# Altium PCB soldering_station_controls.PcbDoc
Units mil, origin at the board's own origin, x right, y up, seen from the top; angles counter-clockwise.
Board outline 2900 x 925 mil, 2 copper layers (Top Layer, Bottom Layer); 17 components, 11 nets, 51 pads, 1 vias.
Unrouted connection lines stored in the file: 22.
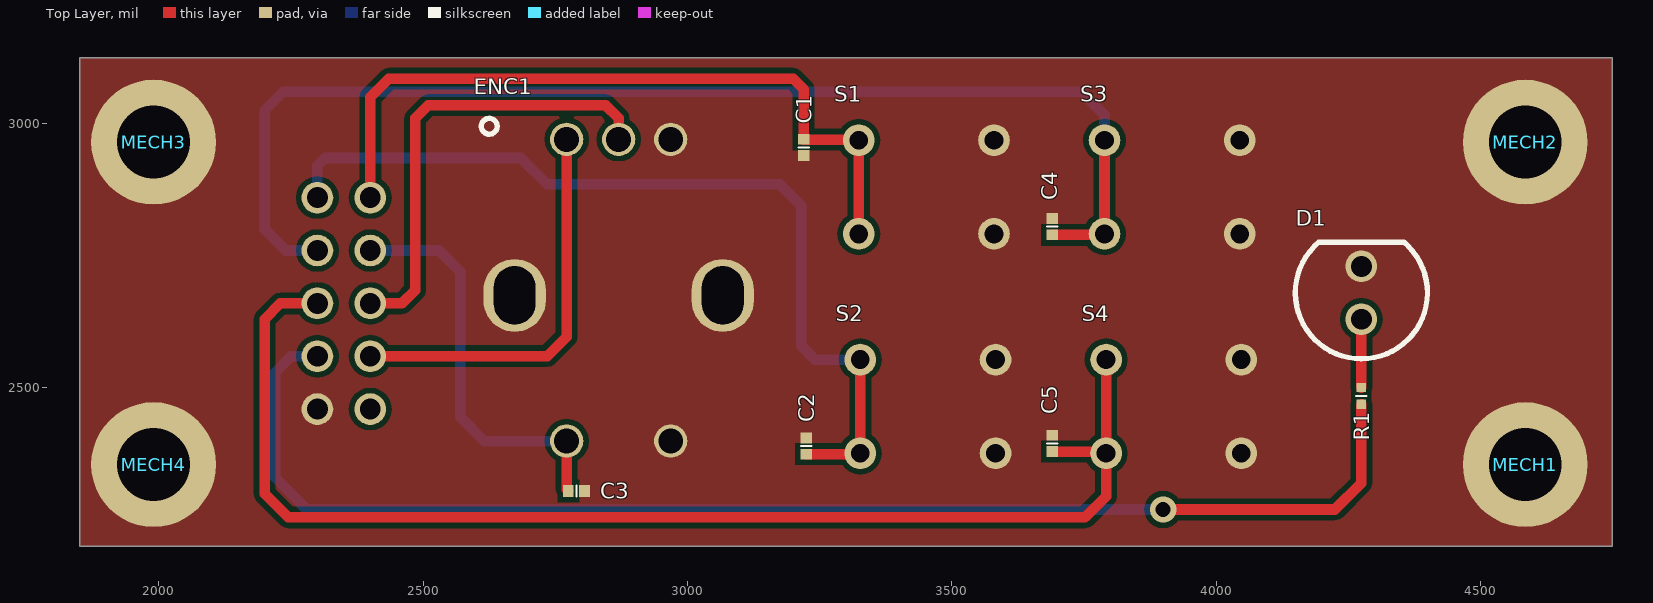
[diagram p0: Top Layer view]
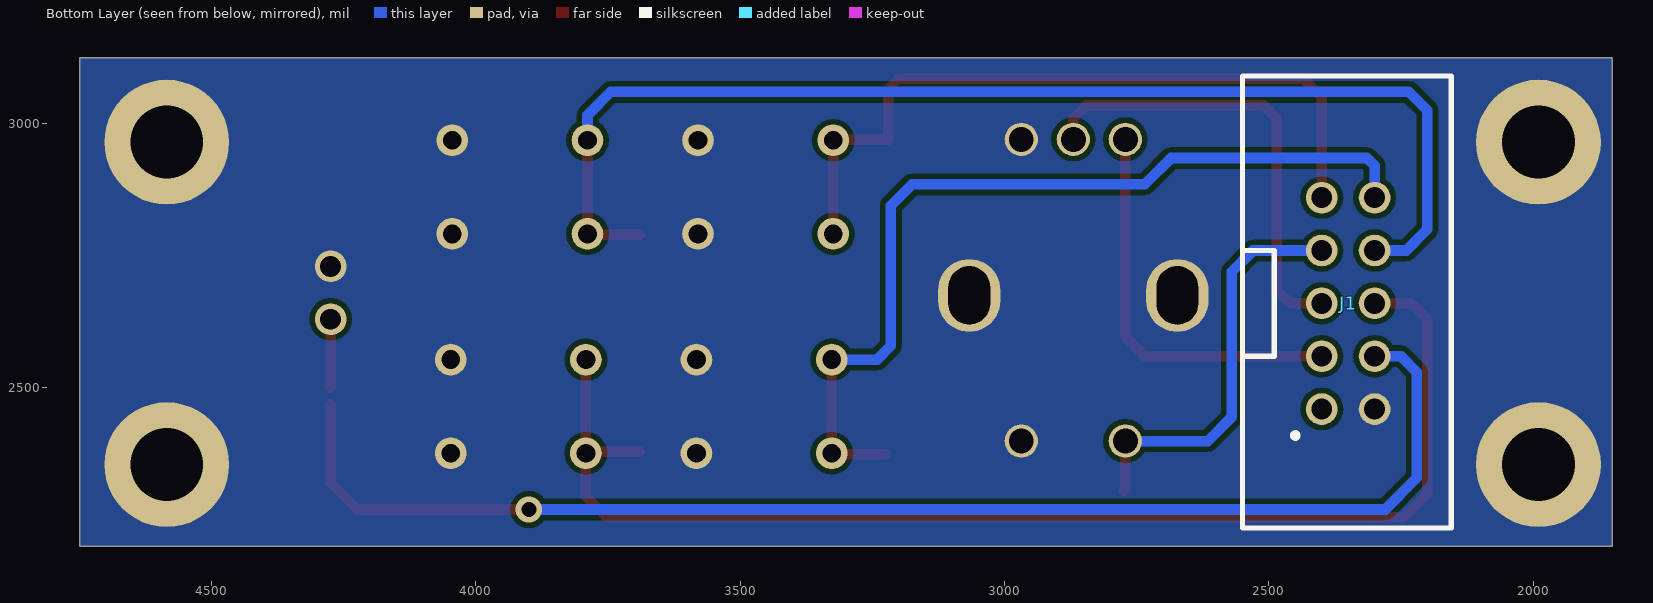
[diagram p1: Bottom Layer view, seen from below]
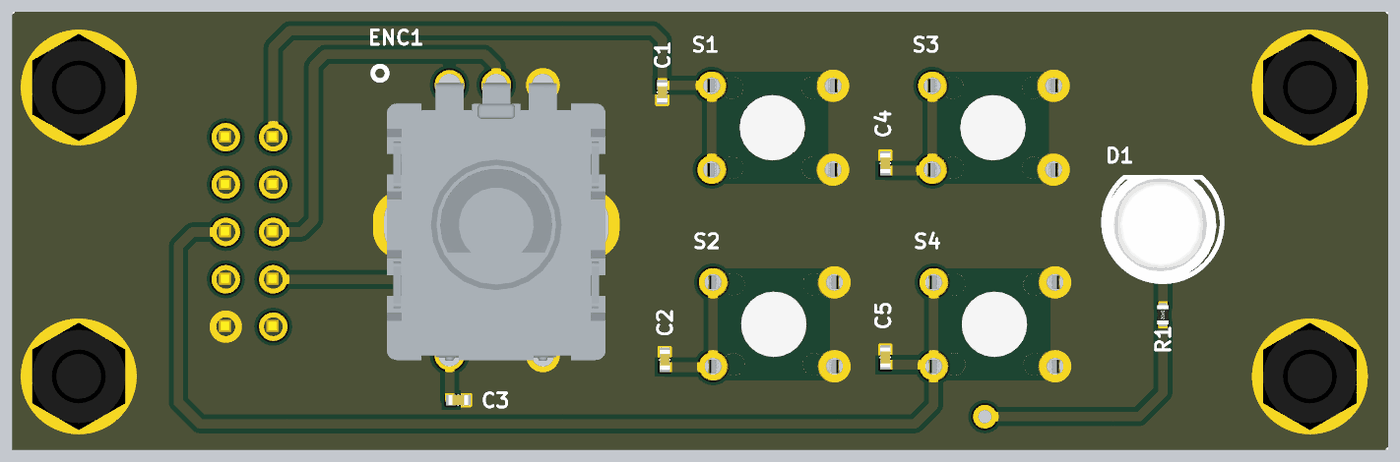
[diagram p2: 3D render of the assembled board from above, using the file's embedded part models]

## Layer stack, top to bottom
Top Solder: solder mask 0.4, Solder Resist, Dk 3.5
Top Layer: signal copper 1.4
Dielectric 1: dielectric 12.6, FR-4, Dk 4.8
Bottom Layer: signal copper 1.4
Bottom Solder: solder mask 0.4, Solder Resist, Dk 3.5

## Board outline
1850,2200 4750,2200 4750,3125 1850,3125

## Design rules (kind name [scope] priority, off if disabled: settings)
Clearance [All] p1: gap=10 ignorepadtopadclearanceinfootprint=FALSE except(0: Arc-Hole Track-Hole SMDPad-Hole THPad-Hole Via-Hole Fill-Hole Poly-Hole Region-Hole Text-Hole)
PolygonConnect PolygonConnect_2 [All vs IsNamedPolygon('Top Layer-GND') Or  IsNamedPolygon('Bottom Layer-GND')] p1: connectstyle=Direct reliefconductorwidth=10 reliefentries=4 polygonreliefangle="90 Angle" airgapwidth=10
PolygonConnect PolygonConnect_1 [All vs IsNamedPolygon('Top Layer-GND') Or  IsNamedPolygon('GND_L02_P000')] p2: thpad.connectstyle=Direct thpad.reliefconductorwidth=10 thpad.reliefentries=4 thpad.polygonreliefangle="90 Angle" thpad.airgapwidth=10 smdpad.connectstyle=Direct smdpad.reliefconductorwidth=10 smdpad.reliefentries=4 smdpad.polygonreliefangle="90 Angle" smdpad.airgapwidth=10 via.connectstyle=Relief via.reliefconductorwidth=10 via.reliefentries=4 via.polygonreliefangle="90 Angle" via.airgapwidth=10
PolygonConnect [All] p3: connectstyle=Relief reliefconductorwidth=10 reliefentries=4 polygonreliefangle="90 Angle" airgapwidth=10
RoutingVias [All] p1: holewidth=28 width=50 viastyle="Through Hole" minholewidth=28 minwidth=50 maxholewidth=28 maxwidth=50
SolderMaskExpansion [All] p1: expansion=4
Width [All] p1: maxlimit=50 minlimit=10 preferedwidth=10 minimp=50.000000 maximp=50.000000 favimp=50.000000
30 further rules are at their usual default settings.

## Classes and differential pairs
component class U_controls: C1 C2 C3 C4 C5 D1 ENC1 R1 S1 S2 S3 S4
component class U_connectors: J1 MECH1 MECH2 MECH3 MECH4

## Components (designator, comment, footprint, x,y, rotation, side; value= is the part's Value field where it differs from the comment)
C1 "Ceramic X7R" C_0402_1005 3220,2955 r270 top value=100nF
C2 "Ceramic X7R" C_0402_1005 3225,2390 r90 top value=100nF
C3 "Ceramic X7R" C_0402_1005 2790,2305 r0 top value=100nF
C4 "Ceramic X7R" C_0402_1005 3690,2805 r90 top value=100nF
C5 "Ceramic X7R" C_0402_1005 3690,2395 r90 top value=100nF
D1 "LED_5mm" LED_5mm 4275,2630 r90 top
ENC1 "Wurth Elektronik 482016514001" ENCODER 2870,2675 r0 top
J1 "2x5 IDC" IDC_2x5 2300,2660 r90 bottom
MECH1 "M3X0.5" MECH_SPACER_MALE_FEMALE_18MM_M3 4585,2355 r0 top value=TP-18
MECH2 "M3X0.5" MECH_SPACER_MALE_FEMALE_18MM_M3 4585,2965 r0 top value=TP-18
MECH3 "M3X0.5" MECH_SPACER_MALE_FEMALE_18MM_M3 1990,2965 r0 top value=TP-18
MECH4 "M3X0.5" MECH_SPACER_MALE_FEMALE_18MM_M3 1990,2355 r0 top value=TP-18
R1 "Resistor" R_0402_1005 4275,2485 r270 top value=470R
S1 "TACT-613N-F" TACT-613N-F 3452.05,2880 r90 top
S2 "TACT-613N-F" TACT-613N-F 3455,2465 r90 top
S3 "TACT-613N-F" TACT-613N-F 3917.05,2880 r90 top
S4 "TACT-613N-F" TACT-613N-F 3920,2465 r90 top

## Footprints (in the part's own frame and the unit in brackets; to place one, negate y for a bottom-side part, rotate by r counter-clockwise, add the part's x,y. Pads: shape width x height; smd on the part's side, far side on the other; paste and mask are expansions set on the pad)
C_0402_1005 [mm]
  rect 0.52x0.56 smd: 1(-0.39,0) 2(0.39,0)
  silkscreen extent 0,-0.25 0,0.25, body extent -0.52,-0.27 0.53,0.28, height 0.55
ENCODER [mm] "rotary encoder"
  round 1.6 hole 1.2: 1(-2.5,7.5) 2(0,7.5) 3(2.5,7.5) 4(-2.5,-7) 5(2.5,-7)
  oval 3x3.5 hole 2.8 slot 2 at 0 deg: 6(-5,0) 7(5,0)
  silkscreen extent -6.6,7.75 -5.84,8.51, body extent -5.85,-7.3 5.85,7.6, height 26.4
IDC_2x5 [mil] "2x5 IDC Header"
  round 60 hole 39.37: 1(-200,100) 2(-100,100) 3(0,100) 4(100,100) 5(200,100) 6(200,0) 7(100,0) 8(0,0) 9(-100,0) 10(-200,0)
  silkscreen extent -425,-145 430,250, body extent -402,-125 405,225, height 374
LED_5mm [mil] "LED 5mm diameter"
  round 60 hole 39.37: 1(0,0) 2(100,0)
  silkscreen extent -75,-125 146,125, body extent -73,-113 143,123, height 350
MECH_SPACER_MALE_FEMALE_18MM_M3 [mm]
  round 6 hole 3.5: 1(0,0)
  body extent -2.5,-2.89 2.5,2.89, height 18
R_0402_1005 [mm]
  rect 0.45x0.45 smd: 1(-0.4,0) 2(0.4,0)
  silkscreen extent 0,-0.25 0,0.25, body extent -0.52,-0.3 0.52,0.3, height 0.34
TACT-613N-F [mm] "Mikroprze彻cznik TACT; SPST-NO; Pozycje: 2; 0,05A/12VDC"
  round 1.524 hole 0.9: 1(-2.25,3.25) 2(2.25,3.25) 3(-2.25,-3.25) 4(2.25,-3.25)
  body extent -3,-3.85 3,3.85, height 7

## Part data
C1 C2 C3 C4 C5: library part C_100nF_16V_X7R_0402_10, "Capacitor", Dielectric=X7R, Manufacturer=Murata, Manufacturer Part Number=GRM155R71C104KA88D, Tolerance (%)=10, Voltage=16V, HelpURL=https://www.mouser.com/ds/2/281/c02e-2905.pdf, Part Number=C_100nF_16V_X7R_0402_10, SCH_Footprint=0402, Supplier 1=TME, Supplier 2="RS Components", Supplier 3=Farnell, Supplier 4=Mouser, Supplier 5=Digi-Key, Supplier Part Number 4=81-GRM155R71C104KA88
D1: "LED_5mm Diameter"
ENC1: library part ENCODER
J1: library part IDC_2x5, "2x5 IDC Header"
MECH1 MECH2 MECH3 MECH4: library part MECH_SPACER_MALE_FEMALE_18MM_M3, Manufacturer=FIX&FASTEN, Manufacturer Part Number=TP-18, HelpURL=http://www.tme.eu/pl/Document/c63f116060195082d899531b8f30ddf7/TP-10.pdf, Part Number=MECH_SPACER_MALE_FEMALE_18MM_M3, SCH_Footprint=M3, Supplier 1=TME, Supplier 2="RS Components", Supplier 3=Farnell, Supplier 4=Mouser, Supplier 5=Digi-Key, Supplier Part Number 1=TP-18
R1: library part R_470R_0402_1, Manufacturer=Yageo, Manufacturer Part Number=RC0402FR-07470RL, Power=63mW, Supplier Part Number 1=RC0402FR-07470R, Tolerance=1%, Voltage=50V, HelpURL=http://datasheet.octopart.com/RC0402FR-07470RL-Yageo-datasheet-10408619.pdf, Part Number=R_470R_0402_1, SCH_Footprint=0402, Supplier 1=TME, Supplier 2="RS Components", Supplier 3=Farnell, Supplier 4=Mouser, Supplier 5=Digi-Key, Supplier Part Number 3=9239197, Supplier Part Number 4=603-RC0402FR-07470RL, Supplier Part Number 5=311-470LRCT-ND

## Via types
v1: diameter 50, hole 28, Top Layer to Bottom Layer, 1 vias

## Nets (pads, with @x,y where several pads share a name; then routed paths per layer and width w, separated by ;. In a path a pad name is that pad's centre, name@x,y a point inside that pad or via, vN(x,y) a via of type N, cw(c..) or ccw(c..) an arc to the next point about the centre after c; other vN are vias at no path point)
3.3V: J1.1
ENC_A: ENC1.1 J1.2 | length 760.4
  Top Layer w20: J1.2 2735,2560 2771.57,2596.57 ENC1.1
ENC_B: ENC1.2 J1.3 | length 865.8
  Top Layer w20: J1.3 2460,2660 2485,2685 2485,3010 2510,3035 2845,3035 2870,3010 ENC1.2
GND: C1.2 C2.2 C3.2 C4.2 C5.2 D1.2 ENC1.3 ENC1.5 ENC1.6 ENC1.7 J1.10 MECH1.1 MECH2.1 MECH3.1 MECH4.1 S1.3 S1.4 S2.3 S2.4 S3.3 S3.4 S4.3 S4.4
LED: J1.9 R1.2 | length 2542.2
  Top Layer w20: v1(3900,2270) 4225,2270 4275,2320 R1.2
  Bottom Layer w20: J1.9 2250,2560 2220,2530 2220,2330 2280,2270 v1(3900,2270)
NetD1_1: D1.1 R1.1 | length 129.3
  Top Layer w20: R1.1 D1.1
SW: C3.1 ENC1.4 J1.4 | length 777.7
  Top Layer w20: ENC1.4 2771.57,2308.07 C3.1
  Bottom Layer w20: J1.4 2530,2760 2570,2720 2570,2445 2615.59,2399.41 ENC1.4
SW1: C1.1 J1.5 S1.1 S1.2 | length 1410.2
  Top Layer w20: J1.5 2400,3050 2435,3085 3200,3085 3220,3065 C1.1 3220.47,2969.88 3324.09,2969.88 S1.2 S1.1
SW2: C2.1 J1.6 S2.1 S2.2 | length 1686.4
  Top Layer w20: C2.1 3325.28,2374.65 S2.1 S2.2
  Bottom Layer w20: J1.6 2300,2920 2315,2935 2685,2935 2735,2885 3175,2885 3215,2845 3215,2580 3241.42,2553.58 S2.2
SW3: C4.1 J1.7 S3.1 S3.2 | length 2287.7
  Top Layer w20: C4.1 3787.32,2789.65 S3.1 S3.2
  Bottom Layer w20: J1.7 2240,2760 2200,2800 2200,3025 2235,3060 3745,3060 3789.09,3015.91 S3.2
SW4: C5.1 J1.8 S4.1 S4.2 | length 2431.6
  Top Layer w20: J1.8 2230,2660 2200,2630 2200,2300 2245,2255 3752.05,2255 3792.05,2295 S4.1 ; C5.1 3788.82,2379.65 S4.1 ; S4.2 S4.1

## Polygon pours and split planes (outlines as drawn)
GND on Bottom Layer "Bottom Layer-GND" (solid, pour order 0): 4750,3125 4750,2200 1850,2200 1850,3125
GND on Top Layer "Top Layer-GND" (solid, pour order 2): 4750,3125 4750,2200 1850,2200 1850,3125

## Dimensions
4750,3125 to 4750,2200 on Top Overlay
1850,3125 to 4750,3125 on Top Overlay

## Text inside footprints (layer, text, board x,y; h text height)
C1: Mechanical 17 "d" at 3218,2984 h30 r270; Mechanical 19 "-" at 3218,2984 h30 r270
C2: Mechanical 17 "d" at 3227,2361 h30 r90; Mechanical 19 "-" at 3227,2361 h30 r90
C3: Mechanical 17 "d" at 2761,2303 h30; Mechanical 19 "-" at 2761,2303 h30
C4: Mechanical 17 "d" at 3692,2776 h30 r90; Mechanical 19 "-" at 3692,2776 h30 r90
C5: Mechanical 17 "d" at 3692,2366 h30 r90; Mechanical 19 "-" at 3692,2366 h30 r90
MECH1: Mechanical 17 "d" at 4454,2336 h30; Mechanical 19 "-" at 4453.47,2335.32 h30
MECH2: Mechanical 17 "d" at 4454,2946 h30; Mechanical 19 "-" at 4453.47,2945.32 h30
MECH3: Mechanical 17 "d" at 1859,2946 h30; Mechanical 19 "-" at 1858.47,2945.32 h30
MECH4: Mechanical 17 "d" at 1859,2336 h30; Mechanical 19 "-" at 1858.47,2335.32 h30
R1: Mechanical 17 "d" at 4272.08,2516.13 h30 r270; Mechanical 19 "-" at 4272,2516 h30 r270